# Altium PCB keyboard.PcbDoc
Units mil, origin at the board's own origin, x right, y up, seen from the top; angles counter-clockwise.
Board outline 1978.53 x 1978.53 mil, 2 copper layers (Top Layer, Bottom Layer); 39 components, 34 nets, 148 pads, 25 vias.
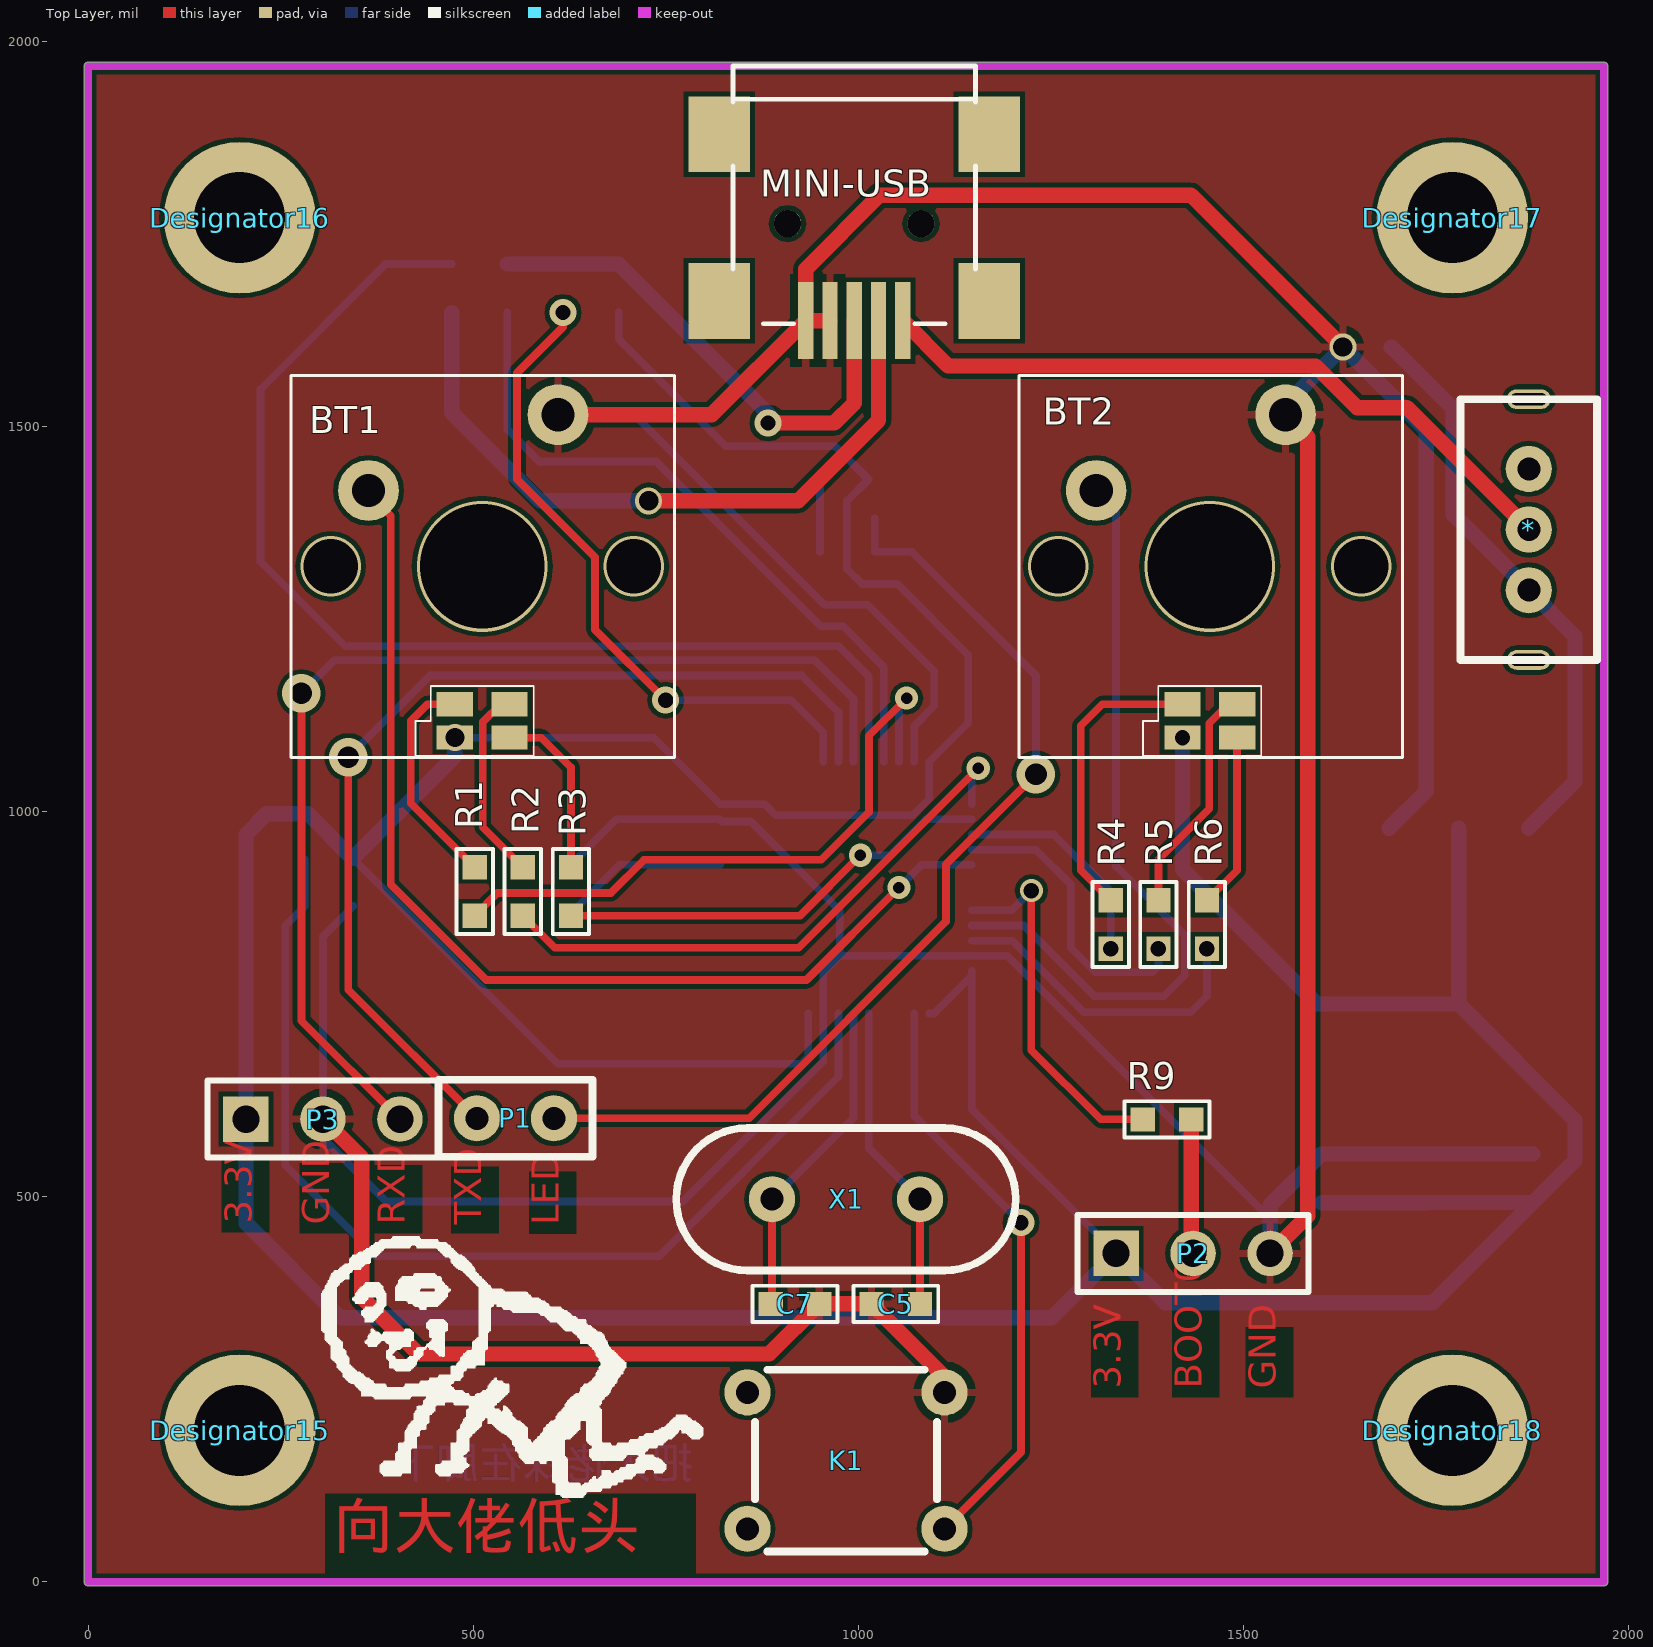
[diagram p0: Top Layer view]
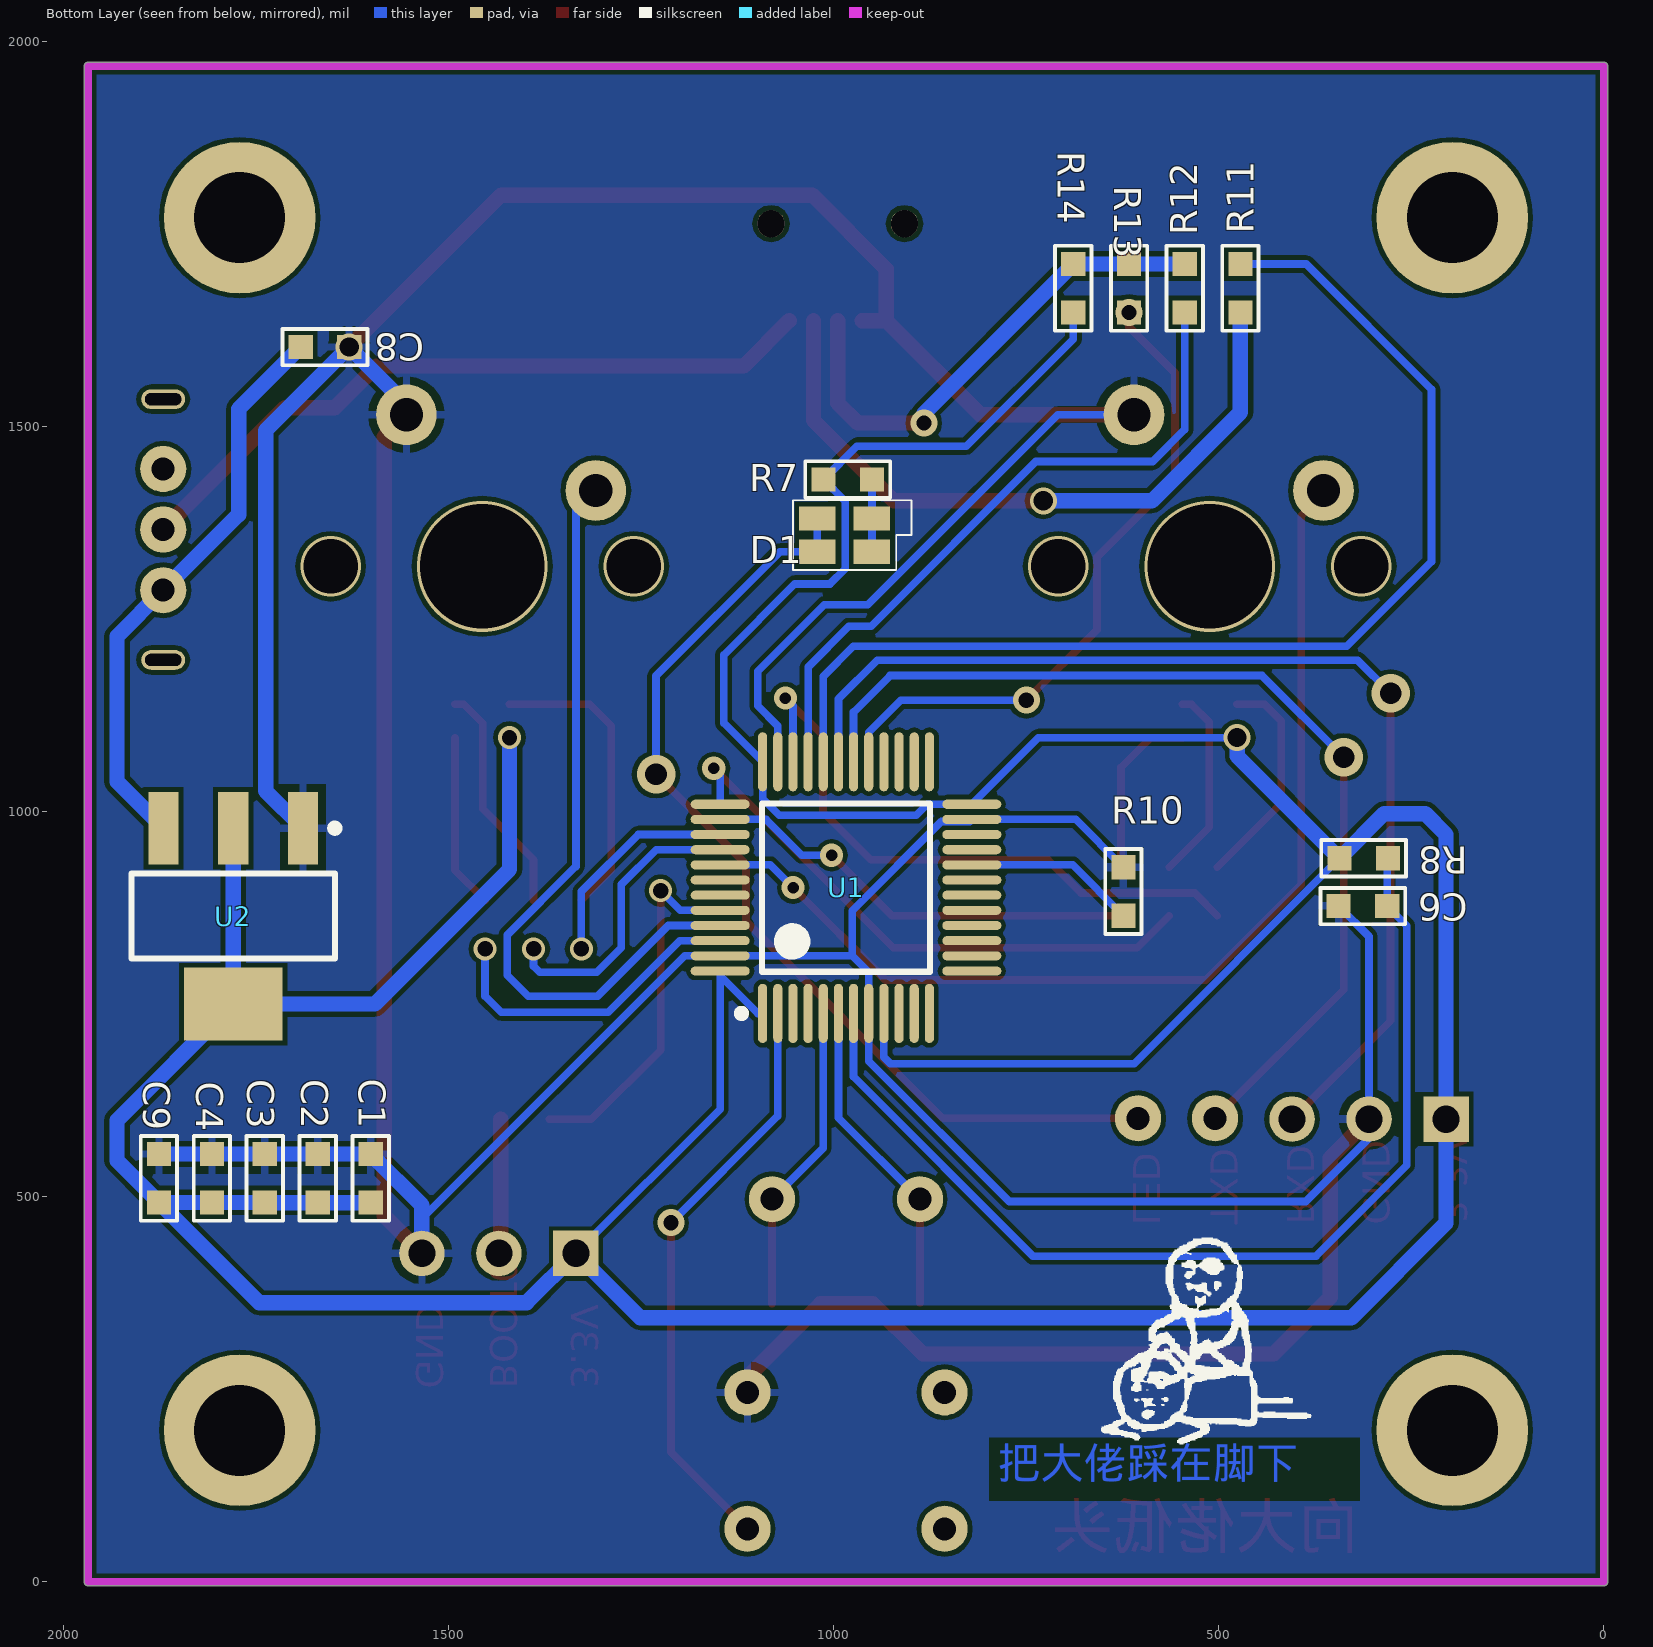
[diagram p1: Bottom Layer view, seen from below]
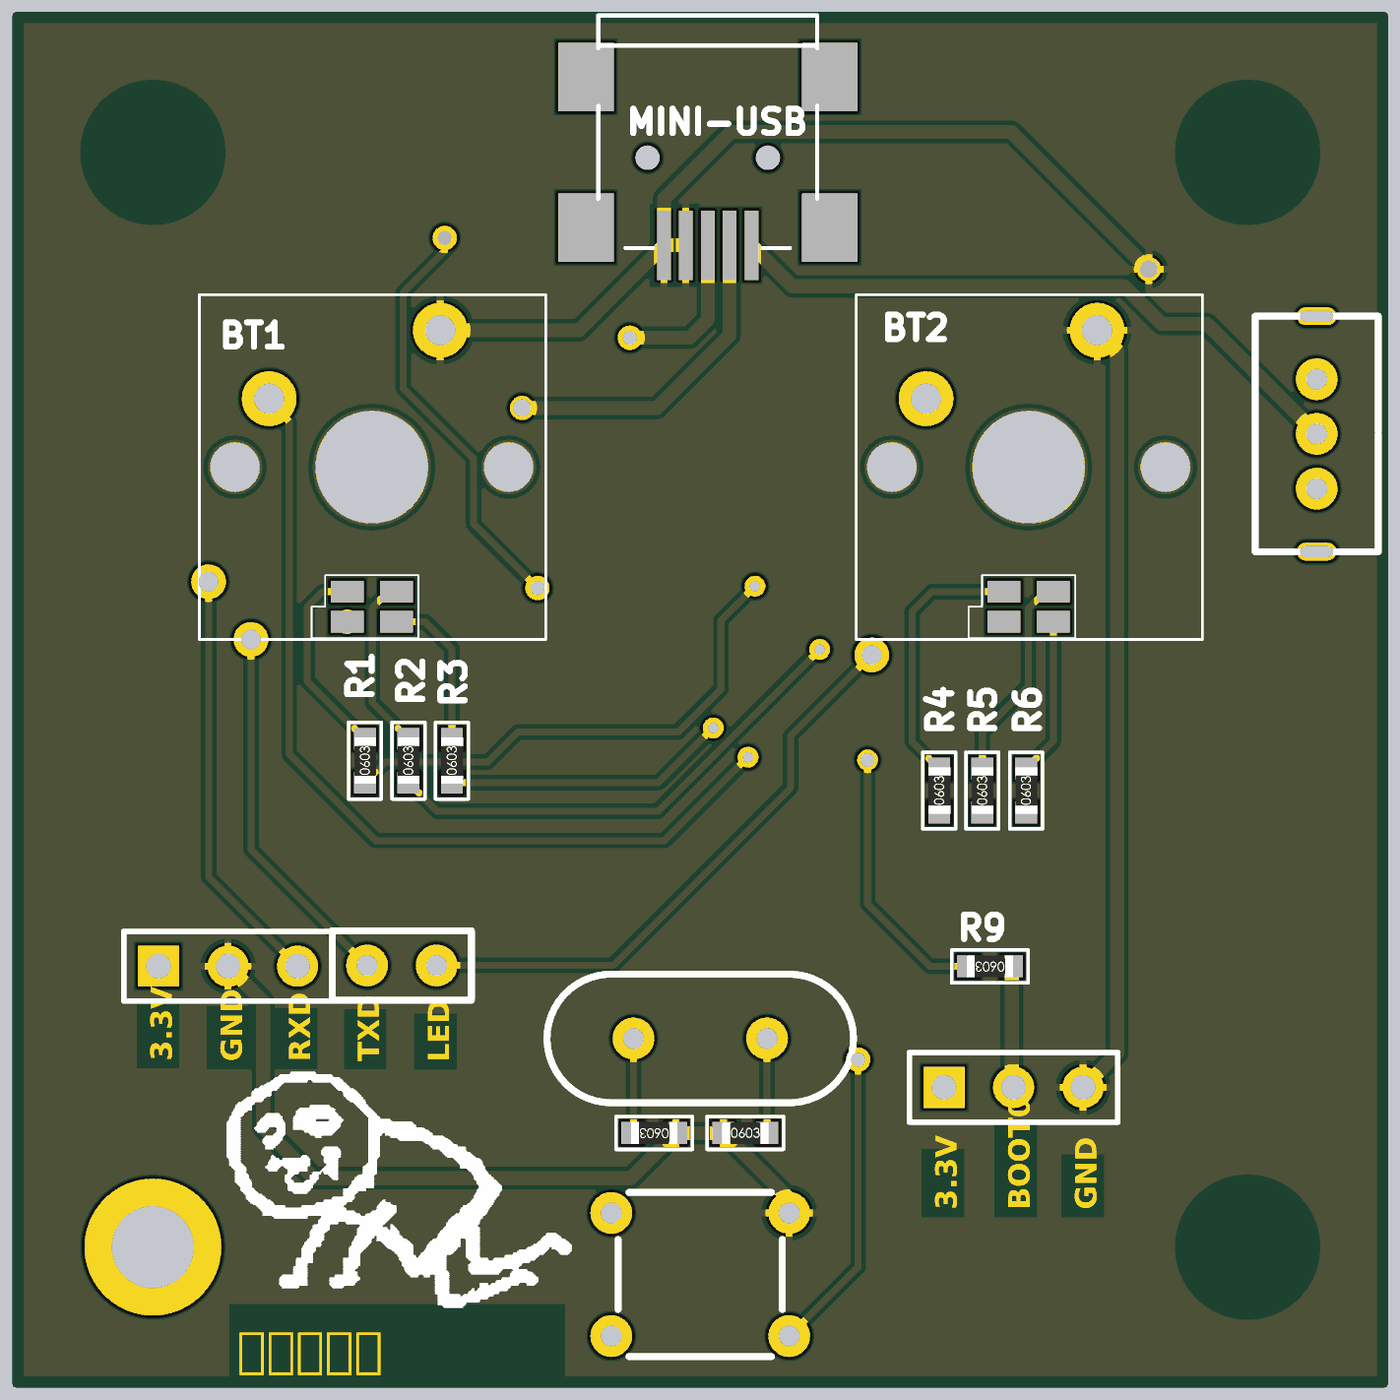
[diagram p2: 3D render of the assembled board from above, using the file's embedded part models]
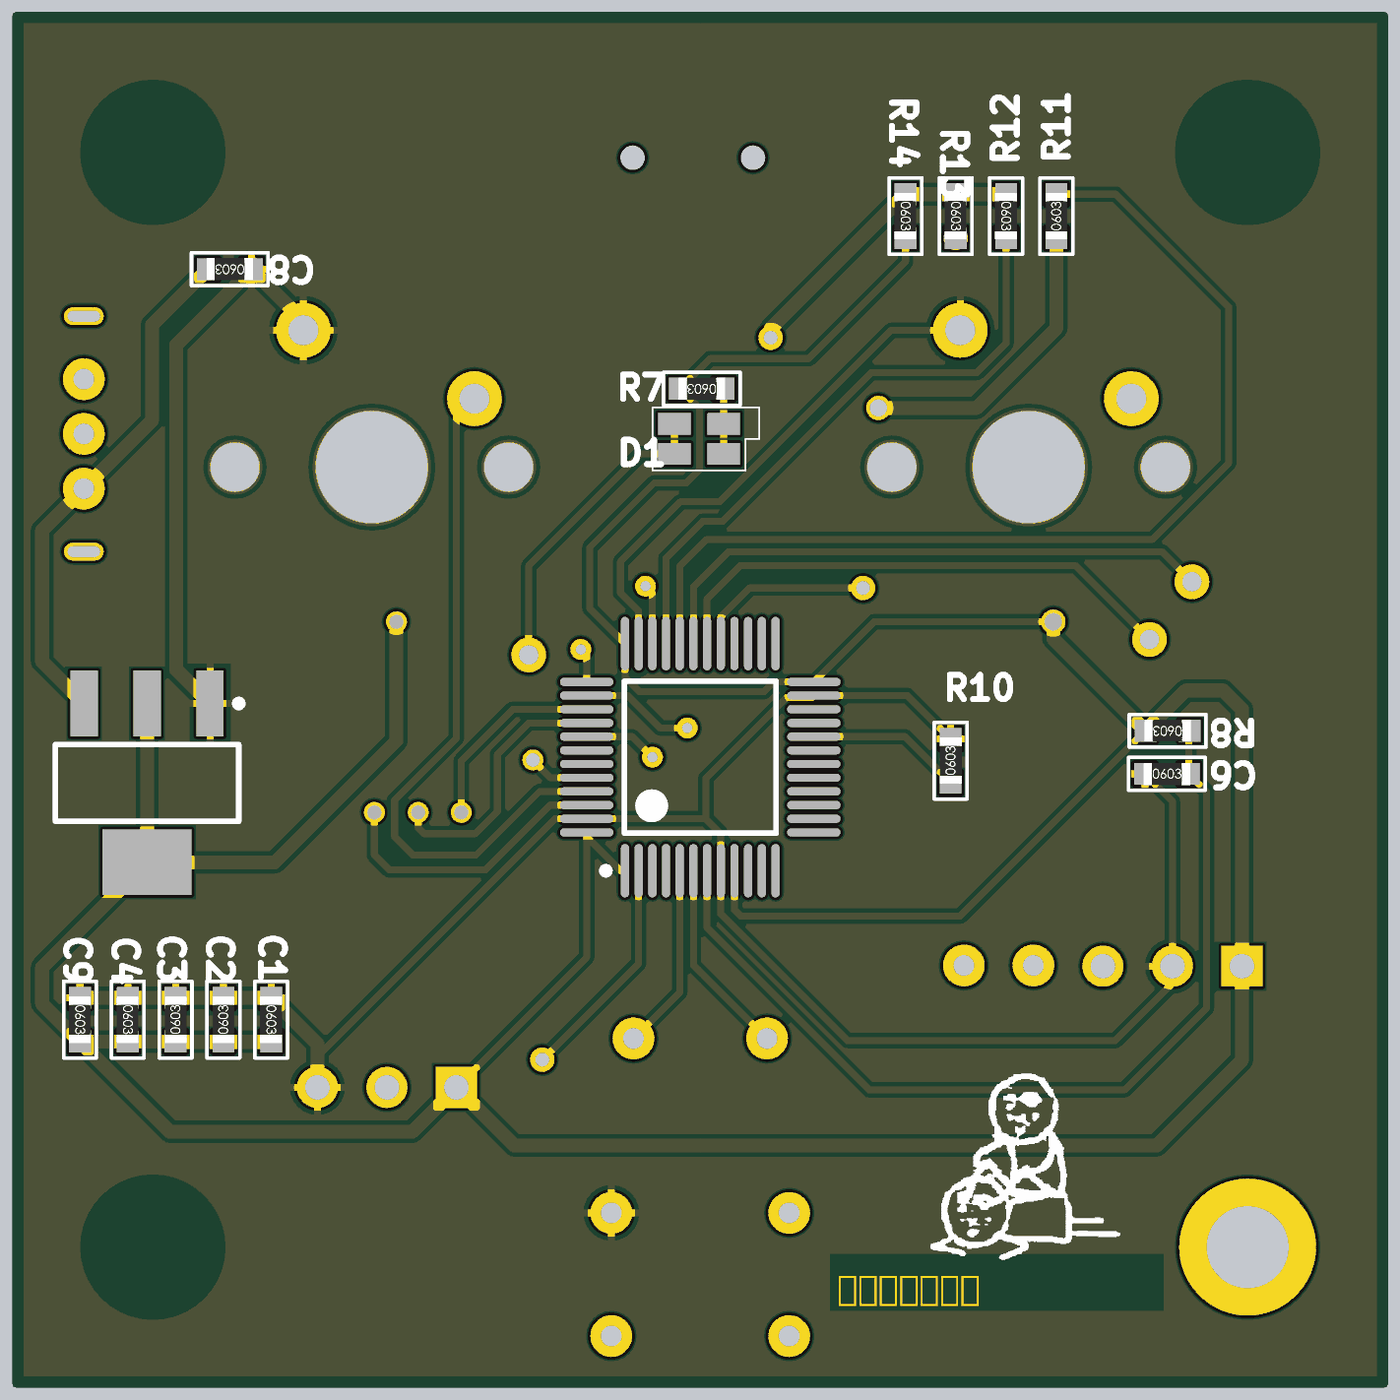
[diagram p3: 3D render of the assembled board from below, using the file's embedded part models]

## Layer stack, top to bottom
Top Layer: signal copper 1.4
Dielectric: dielectric 12.6, FR-4, Dk 4.8
Bottom Layer: signal copper 1.4

## Board outline
-5.01,0 ccw(c0,0) 0,-5.02 1968.5,-5.02 ccw(c1968.5,0) 1973.52,0 1973.52,1968.5 ccw(c1968.5,1968.5) 1968.5,1973.52 0,1973.52 ccw(c0,1968.5) -5.01,1968.5

## Design rules (kind name [scope] priority, off if disabled: settings)
Clearance [All] p1: gap=6
ComponentClearance [All] p1: gap=0 collisioncheckmode=3 verticalgap=10 showdistances=FALSE
HoleToHoleClearance [All] p1: gap=9 allowstackedmicrovias=TRUE
MinimumSolderMaskSliver [All] p1: minsoldermaskwidth=0
PolygonConnect [All] p1: connectstyle=Relief reliefconductorwidth=10 reliefentries=4 polygonreliefangle="90 Angle" airgapwidth=10
RoutingVias [All] p1: holewidth=28 width=50 viastyle="Through Hole" minholewidth=28 minwidth=50 maxholewidth=28 maxwidth=50
SilkToSilkClearance [All] p1: silktosilkclearance=0
SilkToSolderMaskClearance [IsPad] p1: minsilkscreentomaskgap=0 clearancetoexposedcopper=TRUE
SolderMaskExpansion [All] p1: expansion=4
Width [All] p1: maxlimit=30 minlimit=10 preferedwidth=10 minimp=50.000000 maximp=50.000000 favimp=50.000000
23 further rules are at their usual default settings.

## Classes and differential pairs
component class keyboard: * BT1 BT2 C1 C2 C3 C4 C5 C6 C7 C8 C9 D1 K1 MINI-USB P1 P2 P3 R1 R2 R3 R4 R5 R6 R7 R8 R9 R10 R11 R12 R13 R14 U1 U2 X1

## Components (designator, comment, footprint, x,y, rotation, side; value= is the part's Value field where it differs from the comment)
* "开关" 开关 1871,1366.65 r90 top
BT1 "Cherry-RGB" Cherry-RGB_0805 511.81,1318.9 r0 top
BT2 "Cherry-RGB" Cherry-RGB_0805 1456.69,1318.9 r0 top
C1 "0603_CAP" 0603 1601.5,524.14 r270 bottom
C2 "0603_CAP" 0603 1670.25,524.14 r90 bottom
C3 "0603_CAP" 0603 1739,524.14 r90 bottom
C4 "0603_CAP" 0603 1807.75,524.14 r270 bottom
C5 "0603_CAP" 0603 1049,361 r0 top
C6 "0603_CAP" 0603 313,877.65 r180 bottom
C7 "0603_CAP" 0603 918,361 r180 top
C8 "0603_CAP" 0603 1661,1603.65 r0 bottom
C9 "0603_CAP" 0603 1876.5,524.14 r270 bottom
D1 "RGB" RGB 986,1359.65 r0 bottom
Designator15 "Comment" 3MM#1 2168,1196 r90 top
Designator16 "Comment" 3MM#2 2200,1180 r90 top
Designator17 "Comment" 3MM#3 2627,996 r90 top
Designator18 "Comment" 3MM#4 3006,1209 r90 top
K1 "SW-2A" SW-2A 984.25,157.48 r180 top
MINI-USB "MINI-USB" MINI-USB 995,1763.94 r0 top
P1 "Header 2" "Header 2" 555,602 r0 top
P2 "Header 3" "Header 3" 1335,426.65 r90 top
P3 "Header 3" "Header 3" 205,601 r90 top
R1 "0603_RES" 0603 502,896.65 r90 top
R2 "0603_RES" 0603 564.5,896.65 r90 top
R3 "0603_RES" 0603 627,896.65 r90 top
R4 "0603_RES" 0603 1328,853.65 r90 top
R5 "0603_RES" 0603 1390,853.65 r90 top
R6 "0603_RES" 0603 1453,853.65 r90 top
R7 "0603_RES" 0603 982,1431.65 r0 bottom
R8 "0603_RES" 0603 312,939.65 r0 bottom
R9 "0603_RES" 0603 1401,600.65 r180 top
R10 "0603_RES" 0603 624,896.65 r90 bottom
R11 "0603_RES" 0603 472,1680 r90 bottom
R12 "0603_RES" 0603 544.33,1680 r270 bottom
R13 "0603_RES" 0603 616.67,1680 r270 bottom
R14 "0603_RES" 0603 689,1680 r270 bottom
U1 "STM32F104C8T6" LQFP-48pin 984.25,901.65 r90 bottom
U2 "AMS1117" AMS1117 1780,864.65 r0 bottom
X1 "XTAL" XTAL-DIP 984.25,497 r0 top

## Footprints (in the part's own frame and the unit in brackets; to place one, negate y for a bottom-side part, rotate by r counter-clockwise, add the part's x,y. Pads: shape width x height; smd on the part's side, far side on the other; paste and mask are expansions set on the pad)
3MM#1 [mm]
  round 5 hole 3: 1(-25.378,50.067)
3MM#2 [mm]
  round 5 hole 3: 1(15.028,50.88)
3MM#3 [mm]
  round 5 hole 3: 1(19.702,21.726)
3MM#4 [mm]
  round 5 hole 3: 1(-25.709,31.352)
0603 [mm]
  rect 0.8x0.8 smd: 1(-0.8,0) 2(0.8,0)
  silkscreen extent -1.4,-0.6 1.4,0.6, body extent -0.85,-0.41 0.85,0.39, height 0.56
AMS1117 [mm]
  rect 1x2.4 smd: 1(-2.3,-2.9) 2(0,-2.9) 3(2.3,-2.9)
  rect 3.25x2.4 smd: 2(0,2.9)
  silkscreen extent -3.47,-3.02 3.35,1.4, body extent -3.35,-1.85 3.35,1.85, height 1.8
Cherry-RGB_0805 [mm] "Cherry-RGB (R_2.0-2.2V,G_3.0-3.2V,B3.0-3.2V) 20mA"
  round 2 hole 1.1: 1(-3.75,2.5) 2(2.5,5)
  rect 1.2x0.8 smd: 3(-0.9,-4.55) 4(0.9,-4.55) 5(0.9,-5.65) 6(-0.9,-5.65)
  silkscreen extent -6.3,-6.3 6.35,6.3
"Header 2" [mil]
  round 60 hole 30: 1(-50,0) 2(50,0)
  silkscreen extent -100,-50 100,50, body extent -100,-49 100,49, height 285
"Header 3" [mm]
  rect 1.5x1.5 hole 0.9: 1(0,0)
  round 1.5 hole 0.9: 2(0,-2.54) 3(0,-5.08)
  silkscreen extent -1.27,-6.35 1.27,1.27, body extent -1.32,-6.32 1.22,1.3, height 8.54
LQFP-48pin [mm] "TSQFP, 48-Leads, Body 7.00x7.00mm, Pitch 0.50mm, IPC Low Density"
  oval 1.95x0.3 smd: 1(-4.15,2.75) 2(-4.15,2.25) 3(-4.15,1.75) 4(-4.15,1.25) 5(-4.15,0.75) 6(-4.15,0.25) 7(-4.15,-0.25) 8(-4.15,-0.75) 9(-4.15,-1.25) 10(-4.15,-1.75) 11(-4.15,-2.25) 12(-4.15,-2.75) 25(4.15,-2.75) 26(4.15,-2.25) 27(4.15,-1.75) 28(4.15,-1.25) 29(4.15,-0.75) 30(4.15,-0.25) 31(4.15,0.25) 32(4.15,0.75) 33(4.15,1.25) 34(4.15,1.75) 35(4.15,2.25) 36(4.15,2.75)
  oval 0.3x1.95 smd: 13(-2.75,-4.15) 14(-2.25,-4.15) 15(-1.75,-4.15) 16(-1.25,-4.15) 17(-0.75,-4.15) 18(-0.25,-4.15) 19(0.25,-4.15) 20(0.75,-4.15) 21(1.25,-4.15) 22(1.75,-4.15) 23(2.25,-4.15) 24(2.75,-4.15) 37(2.75,4.15) 38(2.25,4.15) 39(1.75,4.15) 40(1.25,4.15) 41(0.75,4.15) 42(0.25,4.15) 43(-0.25,4.15) 44(-0.75,4.15) 45(-1.25,4.15) 46(-1.75,4.15) 47(-2.25,4.15) 48(-2.75,4.15)
  silkscreen extent -4.27,-2.78 2.78,3.57, body extent -3.5,-3.5 3.5,3.5, height 1.6
MINI-USB [mm]
  rect 0.508x2.54 smd: 1(1.6,-3.2) 2(0.8,-3.2) 3(0,-3.2) 4(-0.8,-3.2) 5(-1.6,-3.2)
  rect 2.032x2.5 smd: 6(-4.45,-2.55) 7(-4.45,2.95) 8(4.45,2.95) 9(4.45,-2.55)
  round 0.9 hole 0.9 unplated: 10(2.2,0) 11(-2.2,0)
  silkscreen extent -4,-3.3 4,5.2
RGB [mm]
  rect 1.2x0.8 smd: 1(-0.9,-0.545) 1(-0.9,0.555) 2(0.9,-0.545) 2(0.9,0.555)
  silkscreen extent -2.2,-1.14 1.7,1.16
SW-2A [mil]
  round 60 hole 30: 1(-127.95,88.58) 2(-127.95,-88.58) ""(127.95,88.58) ""(127.95,-88.58)
  silkscreen extent -118,-118 118,118, body extent -163,-128 163,128, height 169
XTAL-DIP [mil] "DIP"
  round 60 hole 30: 1(-96.06,0) 2(96.06,0)
  silkscreen extent -220,-93 220,93, body extent -223,-92 223,92, height 142
开关 [mm]
  oval 0.65x1.45 hole 0.4 slot 1.2 at 90 deg: 0(-4.3,0) 0(4.3,0)
  round 1.524 hole 0.762: 1(0,0) 2(-2,0) 3(2,0)
  silkscreen extent -4.3,-2.25 4.3,2.25

## Part data
C1 C2 C3 C4 C5 C6 C7 C8 C9: "0603"
P1: "DIP 2.54"
X1: "DIP"

## Via types
v1: diameter 30, hole 20, Top Layer to Bottom Layer, 5 vias
v2: diameter 35, hole 20, Top Layer to Bottom Layer, 4 vias
v3: diameter 30, hole 15, Top Layer to Bottom Layer, 4 vias
v4: diameter 78.74, hole 70.87, Top Layer to Bottom Layer, tented both sides, 4 vias
v5: diameter 35, hole 25, Top Layer to Bottom Layer, 3 vias
v6: diameter 50, hole 28, Top Layer to Bottom Layer, 3 vias
v7: diameter 170, hole 161.42, Top Layer to Bottom Layer, tented both sides, 2 vias

## Nets (pads, with @x,y where several pads share a name; then routed paths per layer and width w, separated by ;. In a path a pad name is that pad's centre, name@x,y a point inside that pad or via, vN(x,y) a via of type N, cw(c..) or ccw(c..) an arc to the next point about the centre after c; other vN are vias at no path point)
3.3V: BT1.6 BT2.6 C1.2 C2.1 C3.1 C4.2 C9.2 P2.1 P3.1 R7.2 R8.2 R14.2 U1.1 U1.9 U1.24 U1.36 U1.48 U2.2 | length 7098.4
  Bottom Layer w10: R8.2 610.14,673 926.43,673 935.04,681.61 U1.9 ; v5(476.38,1096.46) 734.32,1096.46 U1.24 878.73,1009.91 893,995.65 1071,995.65 1092.52,1017.17 U1.36 1143,1115.51 1143,1203.65 1050.64,1296 1005,1296 985.19,1315.81 985.19,1404.15 ; R14.2 689,1614 828,1475 970.14,1475 R7.2 986,1404.15 ; U1.1 1098.74,738.26 1147.64,787.16 ; U1.48 1147.64,787.16 ; P2.1 1147.64,614.01 1147.64,787.16
  Bottom Layer w20: v5(476.38,1096.46) 476.38,1072.53 R8.2 285.5,997.65 232,997.65 205,970.65 205,466 328,343 1251.35,343 P2.1 1399,362.65 1746.5,362.65 C9.2 ; v1(1421.26,1096.46) 1421.26,925.38 1596.17,750.47 U2.2@1780,750.47 ; C1.2@1602,492.15 C3.1@1739.5,492.15 ; C3.1 C4.2 C9.2 ; U2.2@1780,978.82 U2.2@1780,750.47 ; U2.2@1780,750.47 1931,599.47 1931,547.15 C9.2
5V: *.1 MINI-USB.1 | length 925.4
  Top Layer w20: MINI-USB.1 1116.95,1579 1594,1579 1648,1525 1712.64,1525 *.1
+5V: *.2 C8.2 U2.3 | length 748.7
  Bottom Layer w20: C8.2 1773,1523.14 1773,1385.9 *.2 1931,1227.91 1931,1039.27 U2.3
BOOT0: R9.2 U1.44 | length 476.7
  Top Layer w10: v1(1225,897.65) 1225,690.65 1315,600.65 R9.2
  Bottom Layer w10: U1.44 1199.47,872.12 v1(1225,897.65)
BOOT1: R10.1 U1.20 | length 224.2
  Bottom Layer w10: R10.1 690.02,931.17 U1.20
GND: BT1.2 BT2.2 C1.1 C2.2 C3.2 C4.1 C5.1 C6.1 C7.1 C8.1 C9.1 K1.2 MINI-USB.4 MINI-USB.5 P2.3 P3.2 R10.2 U1.8 U1.23 U1.35 U1.47 U2.1 | length 7961.2
  Top Layer w20: P3.2 355.5,550.5 355.5,369.5 429,296 884.5,296 C7.1 C5.1 1112.2,266.3 K1.2 ; BT1.2 809.8,1515.75 MINI-USB.5 ; MINI-USB.4 MINI-USB.5 ; P2.3 1584,475.65 1584,1486.87 BT2.2 ; v5(1629.5,1603.65) 1432.15,1801 1028,1801 932.01,1705.01 MINI-USB.5
  Bottom Layer w10: P3.2@305,576 387,494 772.35,494 954.72,676.37 U1.8 954.72,791.72 976.06,813.06 ; P3.2 305,838.15 C6.1 ; BT1.2 709.25,1515.75 956,1269 1012.64,1269 1099,1182.65 1099,1137.65 1072.83,1111.48 U1.35 ; R10.2 686.09,990.23 U1.23 823.64,987.45 860.35,987.45 976.06,871.73 976.06,813.06 ; P2.3 1535,471.65 1193.58,813.06 U1.47 976.06,813.06
  Bottom Layer w20: P2.3 1535,489.14 C1.1 C2.2 C3.2 C4.1 C9.1 ; BT2.2 1555.12,1529.26 v5(1629.5,1603.65) 1738,1495.15 1738,1027.37 U2.1
NetBT1_3: BT1.3 R1.2 | length 290.6
  Top Layer w10: BT1.3 440.76,1139.76 419,1118 419,1011.14 R1.2
NetBT1_4: BT1.4 R2.2 | length 254.3
  Top Layer w10: BT1.4 535.62,1139.76 512.62,1116.76 512.62,980.02 R2.2
NetBT1_5: BT1.5 R3.2 | length 225.5
  Top Layer w10: BT1.5 588.54,1096.46 627,1058 R3.2
NetBT2_3: BT2.3 R4.2 | length 386.6
  Top Layer w10: R4.2 1289,924.14 1289,1111.65 1317.12,1139.76 BT2.3
NetBT2_4: BT2.4 R5.2 | length 303.7
  Top Layer w10: R5.2 1390,938 1456,1004 1456,1115.26 1480.51,1139.76 BT2.4
NetBT2_5: BT2.5 R6.2 | length 227.5
  Top Layer w10: R6.2 1492.13,924.27 BT2.5
NetD1_1: D1.1 R7.1 | length 93.8
  Bottom Layer w10: D1.1@950.57,1337.78 950.57,1381.09 R7.1@950.57,1431.58
NetD1_2: D1.2 P1.2 | length 1302
  Top Layer w10: P1.2 858.35,602 1114,857.65 1114,931.65 v6(1231,1048.65)
  Bottom Layer w10: D1.2@1021.43,1381.09 1021.43,1337.78 1069.87,1337.78 1231,1176.65 v6(1231,1048.65)
NetMINI-USB_2: MINI-USB.2 R11.1 | length 904.4
  Top Layer w20: v5(728,1404) 922,1404 1026.5,1508.5 MINI-USB.2
  Bottom Layer w20: R11.1 472,1519 587,1404 v5(728,1404)
NetMINI-USB_3: MINI-USB.3 R12.1 R13.1 R14.1 | length 661.2
  Top Layer w20: v2(883,1505) 969,1505 995,1531 MINI-USB.3
  Bottom Layer w20: R12.1 R13.1 R14.1 883,1517.5 v2(883,1505)
NetP2_2: P2.2 R9.1 | length 175
  Top Layer w20: R9.1 1432.5,429.15 P2.2
NRST: C6.2 R8.1 U1.7 | length 1354.2
  Bottom Layer w10: R8.1@281.5,938.65 C6.2 256,852.14 256,541 374,423 741.35,423 974.41,656.06 U1.7
OSC_IN: C5.2 U1.5 X1.2 | length 404.6
  Top Layer w10: C5.2@1080.32,361.18 X1.2
  Bottom Layer w10: U1.5 1013.78,563.54 X1.2
OSC_OUT: C7.2 U1.6 X1.1 | length 419.4
  Top Layer w10: C7.2@888.19,362.69 X1.1
  Bottom Layer w10: X1.1 994.09,602.9 U1.6
PA8: R13.2 U1.29 | length 868.4
  Top Layer w10: v2(616.67,1648.5) 616.67,1629.67 557,1570 557,1432 658.29,1330.71 658.29,1236.71 v2(750,1145)
  Bottom Layer w10: v2(750,1145) 913,1145 954.72,1103.28 U1.29
PA13: R1.1 U1.34 | length 822.7
  Top Layer w10: R1.1 531.5,894.65 679,894.65 722,937.65 952,937.65 1014,999.65 1014,1098.65 v3(1063,1147.65)
  Bottom Layer w10: U1.34 1053.15,1137.8 v3(1063,1147.65)
PA14: R2.1 U1.37 | length 755.4
  Top Layer w10: R2.1 606,823.65 923,823.65 v3(1156,1056.65)
  Bottom Layer w10: U1.37 1147.64,1048.28 v3(1156,1056.65)
PA15: R3.1 U1.38 | length 572.4
  Top Layer w10: R3.1 924.5,865.15 v3(1003,943.65)
  Bottom Layer w10: v3(1003,943.65) 1041.63,943.65 1088.21,990.23 U1.38
PB3: R4.1 U1.39 | length 285.5
  Bottom Layer w10: U1.39 1254.1,970.54 1328,896.65 v1(1328,822.15)
PB4: R5.1 U1.40 | length 382.2
  Bottom Layer w10: U1.40 1230.79,950.86 1276,905.65 1276,823.65 1308,791.65 1382,791.65 1390,799.65 v1(1390,822.15)
PB5: BT1.1 U1.41 | length 1385.1
  Top Layer w10: BT1.1@366,1411.65 393,1384.64 393,905.64 517,781.65 933,781.65 v3(1053,901.65)
  Bottom Layer w10: v3(1053,901.65) 1082.53,931.17 U1.41
PB8: BT2.1 U1.45 | length 1002.9
  Bottom Layer w10: U1.45 1215.21,852.43 1307,760.65 1397,760.65 1424,787.65 1424,840.15 1335,929.15 1335,1391.38 BT2.1
PB9: R6.1 U1.46 | length 424.1
  Top Layer w6: R6.1@1443,822.15 v1(1453,822.15)
  Bottom Layer w10: U1.46 1199.9,832.75 1293,739.65 1432,739.65 1453,760.65 v1(1453,822.15)
PC13: K1.1 U1.2 | length 767.9
  Top Layer w10: K1.1 1211.5,168.19 v2(1211.5,466.5)
  Bottom Layer w10: U1.2 1072.83,605.17 v2(1211.5,466.5)
RX: P3.3 U1.31 | length 1443.3
  Top Layer w10: v6(277,1154) 277,729 P3.3
  Bottom Layer w10: v6(277,1154) 320,1197 943.64,1197 994.09,1146.55 U1.31
TX: P1.1 U1.30 | length 1302.7
  Top Layer w10: v6(338,1071) 338,769 P1.1
  Bottom Layer w10: v6(338,1071) 444,1177 927,1177 974.41,1129.59 U1.30
USBDM: R11.2 U1.32 | length 1501.7
  Bottom Layer w10: R11.2 386.5,1711.5 224,1549 224,1325 334,1215 974.64,1215 1013.78,1175.87 U1.32
USBDP: R12.2 U1.33 | length 891.9
  Bottom Layer w10: R12.2 544.33,1496.67 586,1455 737.64,1455 951.64,1241 980.64,1241 1033.46,1188.18 U1.33
pads on no net: *.0 *.3 Designator15.1 Designator16.1 Designator17.1 Designator18.1 K1. MINI-USB.6 MINI-USB.7 MINI-USB.8 MINI-USB.9 MINI-USB.10 MINI-USB.11 U1.3 U1.4 U1.10 U1.11 U1.12 U1.13 U1.14 U1.15 U1.16 U1.17 U1.18 U1.19 U1.21 U1.22 U1.25 U1.26 U1.27 U1.28 U1.42 U1.43
copper on no net:
  other v4: 314.96,1318.9 708.66,1318.9 1259.84,1318.9 1653.54,1318.9
  other v7: 511.81,1318.9 1456.69,1318.9

## Polygon pours and split planes (outlines as drawn)
GND on Bottom Layer "Top Layer-No Net" (solid, pour order 2): 0,1968.5 1968.5,1968.5 1968.5,7.5 1961,0 0,0
GND on Top Layer "Top Layer-No Net" (solid, pour order 4): 0,1962 1962,1962 1968.5,1968.5 1968.5,0 10,0 2,-8

## Keep-outs
Keep-Out Layer:
  lines w10: 0,0 1968.5,0 1968.5,1968.5 0,1968.5 0,0

## Other copper
Top Layer:
  text "3.3V" at 224,465 h60 r90
  text "GND" at 325,464 h60 r90
  text "RXD" at 423,464 h60 r90
  text "TXD" at 522,464 h60 r90
  text "LED" at 623,463 h60 r90
  text "3.3V" at 1353,251 h60 r90
  text "BOOT0" at 1458,251 h60 r90
  text "GND" at 1554,251 h60 r90
  text "向大佬低头" at 318,25 h100
Bottom Layer:
  text "把大佬踩在脚下" at 787,121 h70

## Silkscreen, mask and mechanical layers (free items; w line width, h text height)
Top Overlay:
  drawing of 1325 lines, arcs and shapes, not listed
Bottom Overlay:
  drawing of 972 lines, arcs and shapes, not listed
Top Solder:
  text "3.3V" at 224,465 h60 r90
  text "GND" at 325,464 h60 r90
  text "RXD" at 423,464 h60 r90
  text "TXD" at 522,464 h60 r90
  text "LED" at 623,463 h60 r90
  text "3.3V" at 1353,251 h60 r90
  text "BOOT0" at 1458,251 h60 r90
  text "GND" at 1554,251 h60 r90
  text "向大佬低头" at 318,25 h100
Bottom Solder:
  text "把大佬踩在脚下" at 787,121 h70